# Altium PCB 2.PcbDoc (part 2 of 2)
Units mm, origin at the board's own origin, x right, y up, seen from the top; angles counter-clockwise.
Board outline 132.09 x 69.72 mm, 2 copper layers (Top Layer, Bottom Layer); 43 components, 58 nets, 220 pads, 0 vias.
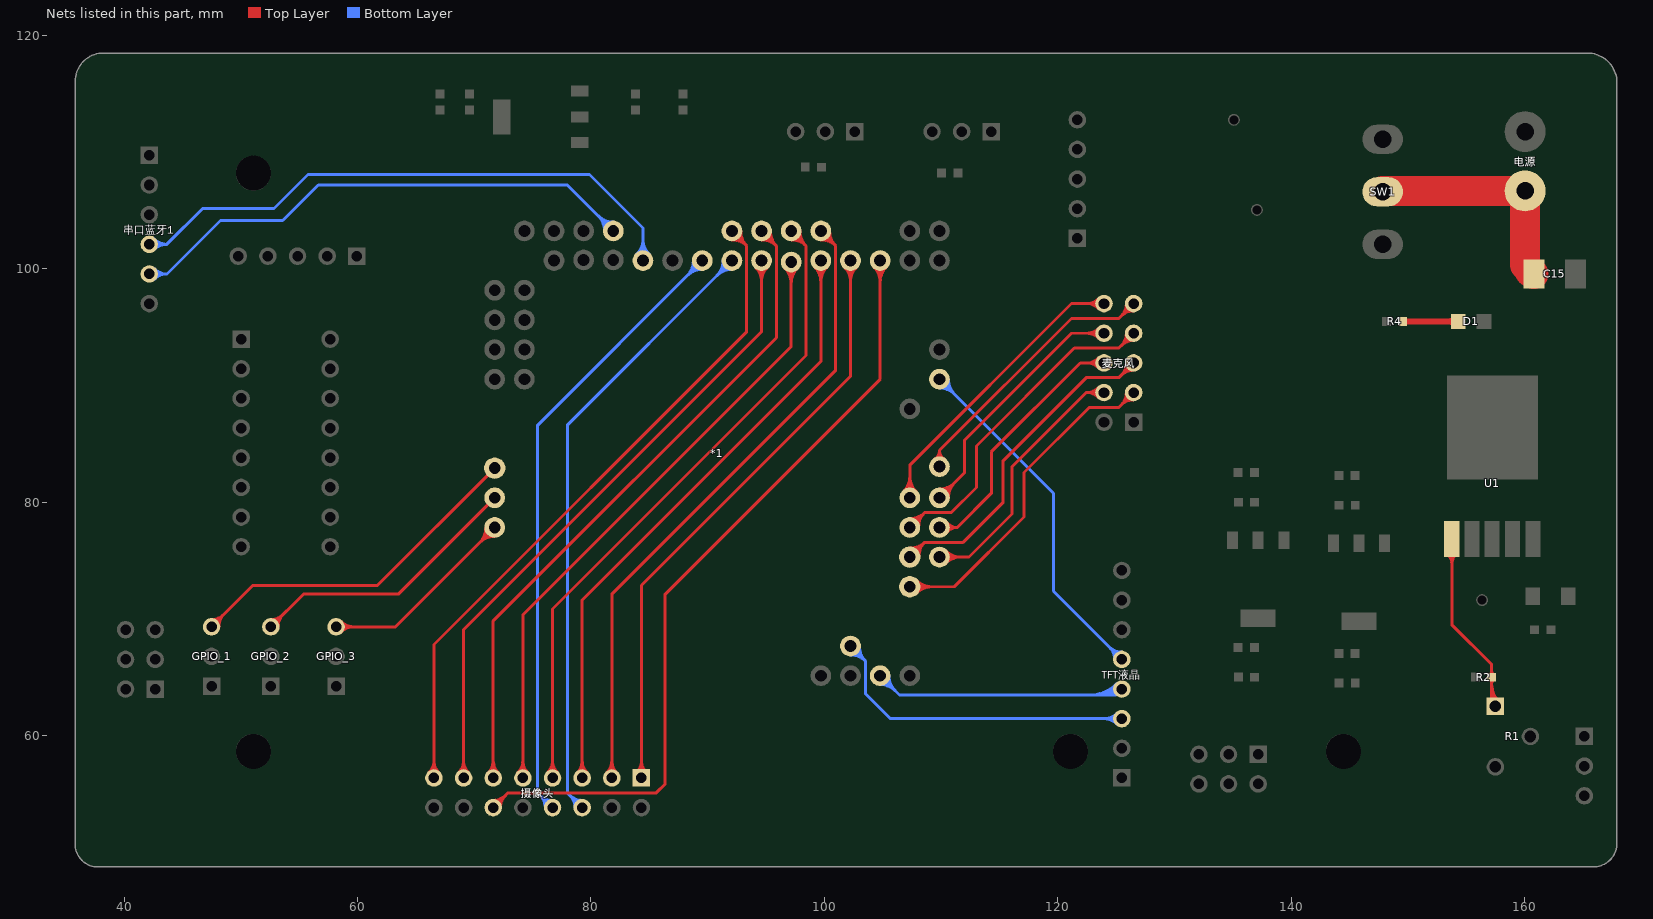
[diagram p2: the nets of this part, all layers, seen from the top]

## Nets (pads, with @x,y where several pads share a name; then routed paths per layer and width w, separated by ;. In a path a pad name is that pad's centre, name@x,y a point inside that pad or via, vN(x,y) a via of type N, cw(c..) or ccw(c..) an arc to the next point about the centre after c; other vN are vias at no path point) (continued)
MKF_1: *1.35 麦克风.4 | length 39.5
  Top Layer w0.254: *1.35@109.855,75.311 112.395,75.311 116.078,78.994 116.078,83.058 122.428,89.408 麦克风.4@123.952,89.408 ; 111.081,75.311 ccw(c111.081,74.085) 110.214,74.952 cw(c111.081,74.085) 111.081,75.311 ; 111.081,75.311 cw(c111.081,76.537) 110.214,75.67 ccw(c111.081,76.537) 111.081,75.311 ; 111.695,75.311 ccw(c111.695,73.471) 110.394,74.772 cw(c111.695,73.471) 111.695,75.311 ; 111.695,75.311 cw(c111.695,77.151) 110.394,75.85 ccw(c111.695,77.151) 111.695,75.311 ; 122.448,89.408 ccw(c122.448,90.912) 123.511,89.849 cw(c122.448,90.912) 122.448,89.408 ; 122.448,89.408 cw(c122.448,87.904) 123.511,88.967 ccw(c122.448,87.904) 122.448,89.408 ; 123.061,89.408 ccw(c123.061,90.299) 123.691,89.669 cw(c123.061,90.299) 123.061,89.408 ; 123.061,89.408 cw(c123.061,88.517) 123.691,89.147 ccw(c123.061,88.517) 123.061,89.408
MKF_2: *1.36 麦克风.3 | length 46.3
  Top Layer w0.254: *1.36@107.315,72.771 111.125,72.771 117.094,78.74 117.094,82.55 122.682,88.138 125.222,88.138 麦克风.3@126.492,89.408 麦克风.3@125.984,89.408 ; 108.603,72.771 ccw(c108.603,71.483) 107.692,72.394 cw(c108.603,71.483) 108.603,72.771 ; 108.603,72.771 cw(c108.603,74.059) 107.692,73.148 ccw(c108.603,74.059) 108.603,72.771 ; 109.216,72.771 ccw(c109.216,70.87) 107.872,72.214 cw(c109.216,70.87) 109.216,72.771 ; 109.216,72.771 cw(c109.216,74.672) 107.872,73.328 ccw(c109.216,74.672) 109.216,72.771 ; 125.428,88.344 ccw(c124.365,89.408) 125.869,89.408 cw(c124.365,89.408) 125.428,88.344 ; 125.428,88.344 cw(c126.492,87.281) 126.492,88.785 ccw(c126.492,87.281) 125.428,88.344 ; 125.862,88.778 ccw(c125.232,89.408) 126.123,89.408 cw(c125.232,89.408) 125.862,88.778 ; 125.862,88.778 cw(c126.492,88.148) 126.492,89.039 ccw(c126.492,88.148) 125.862,88.778
MKF_3: *1.37 麦克风.6 | length 36.6
  Top Layer w0.254: *1.37@109.855,77.851 111.379,77.851 ; 麦克风.6@123.952,91.948 121.92,91.948 114.3,84.328 114.3,80.772 111.379,77.851 ; 110.871,77.851 ccw(c110.871,77.089) 110.261,77.546 cw(c110.871,77.089) 110.871,77.851 ; 110.871,77.851 cw(c110.871,78.613) 110.261,78.156 ccw(c110.871,78.613) 110.871,77.851 ; 111.379,77.851 ccw(c111.379,76.708) 110.465,77.394 cw(c111.379,76.708) 111.379,77.851 ; 111.379,77.851 cw(c111.379,78.994) 110.465,78.308 ccw(c111.379,78.994) 111.379,77.851 ; 122.448,91.948 ccw(c122.448,93.452) 123.511,92.389 cw(c122.448,93.452) 122.448,91.948 ; 122.448,91.948 cw(c122.448,90.444) 123.511,91.507 ccw(c122.448,90.444) 122.448,91.948 ; 123.061,91.948 ccw(c123.061,92.839) 123.691,92.209 cw(c123.061,92.839) 123.061,91.948 ; 123.061,91.948 cw(c123.061,91.057) 123.691,91.687 ccw(c123.061,91.057) 123.061,91.948
MKF_4: *1.38 麦克风.5 | length 44.8
  Top Layer w0.254: *1.38@107.315,75.311 108.585,76.581 ; 麦克风.5@126.492,91.948 125.222,90.678 122.428,90.678 115.316,83.566 115.316,80.01 111.887,76.581 108.585,76.581 ; 108.175,76.171 ccw(c108.968,75.379) 107.848,75.333 cw(c108.968,75.379) 108.175,76.171 ; 108.175,76.171 cw(c107.383,76.964) 107.337,75.844 ccw(c107.383,76.964) 108.175,76.171 ; 108.585,76.581 ccw(c109.755,75.411) 108.102,75.343 cw(c109.755,75.411) 108.585,76.581 ; 108.585,76.581 cw(c107.415,77.751) 107.347,76.098 ccw(c107.415,77.751) 108.585,76.581 ; 125.428,90.884 ccw(c124.365,91.948) 125.869,91.948 cw(c124.365,91.948) 125.428,90.884 ; 125.428,90.884 cw(c126.492,89.821) 126.492,91.325 ccw(c126.492,89.821) 125.428,90.884 ; 125.862,91.318 ccw(c125.232,91.948) 126.123,91.948 cw(c125.232,91.948) 125.862,91.318 ; 125.862,91.318 cw(c126.492,90.688) 126.492,91.579 ccw(c126.492,90.688) 125.862,91.318
MKF_5: *1.39 麦克风.8 | length 38.7
  Top Layer w0.254: *1.39@109.855,80.391 112.014,82.55 112.014,85.344 121.158,94.488 麦克风.8@123.952,94.488 ; 110.722,81.258 ccw(c111.589,80.391) 110.363,80.391 cw(c111.589,80.391) 110.722,81.258 ; 110.722,81.258 cw(c109.855,82.125) 109.855,80.899 ccw(c109.855,82.125) 110.722,81.258 ; 111.156,81.692 ccw(c112.457,80.391) 110.617,80.391 cw(c112.457,80.391) 111.156,81.692 ; 111.156,81.692 cw(c109.855,82.993) 109.855,81.153 ccw(c109.855,82.993) 111.156,81.692 ; 122.448,94.488 ccw(c122.448,95.992) 123.511,94.929 cw(c122.448,95.992) 122.448,94.488 ; 122.448,94.488 cw(c122.448,92.984) 123.511,94.047 ccw(c122.448,92.984) 122.448,94.488 ; 123.061,94.488 ccw(c123.061,95.379) 123.691,94.749 cw(c123.061,95.379) 123.061,94.488 ; 123.061,94.488 cw(c123.061,93.597) 123.691,94.227 ccw(c123.061,93.597) 123.061,94.488
MKF_6: *1.40 麦克风.7 | length 45
  Top Layer w0.254: *1.40@107.315,77.851 108.585,79.121 ; 麦克风.7@126.492,94.488 125.222,93.218 121.412,93.218 113.03,84.836 113.03,81.28 110.871,79.121 108.585,79.121 ; 108.162,78.698 ccw(c108.98,77.88) 107.823,77.86 cw(c108.98,77.88) 108.162,78.698 ; 108.162,78.698 cw(c107.344,79.516) 107.324,78.359 ccw(c107.344,79.516) 108.162,78.698 ; 108.585,79.121 ccw(c109.812,77.894) 108.077,77.864 cw(c109.812,77.894) 108.585,79.121 ; 108.585,79.121 cw(c107.358,80.348) 107.328,78.613 ccw(c107.358,80.348) 108.585,79.121 ; 125.428,93.424 ccw(c124.365,94.488) 125.869,94.488 cw(c124.365,94.488) 125.428,93.424 ; 125.428,93.424 cw(c126.492,92.361) 126.492,93.865 ccw(c126.492,92.361) 125.428,93.424 ; 125.862,93.858 ccw(c125.232,94.488) 126.123,94.488 cw(c125.232,94.488) 125.862,93.858 ; 125.862,93.858 cw(c126.492,93.228) 126.492,94.119 ccw(c126.492,93.228) 125.862,93.858
MKF_7: *1.41 麦克风.10 | length 42.3
  Top Layer w0.254: *1.41@107.315,80.391 107.315,83.185 121.158,97.028 麦克风.10@123.952,97.028 ; 107.315,81.617 ccw(c108.541,81.617) 107.674,80.75 cw(c108.541,81.617) 107.315,81.617 ; 107.315,81.617 cw(c106.089,81.617) 106.956,80.75 ccw(c106.089,81.617) 107.315,81.617 ; 107.315,82.231 ccw(c109.155,82.231) 107.854,80.93 cw(c109.155,82.231) 107.315,82.231 ; 107.315,82.231 cw(c105.475,82.231) 106.776,80.93 ccw(c105.475,82.231) 107.315,82.231 ; 122.448,97.028 ccw(c122.448,98.532) 123.511,97.469 cw(c122.448,98.532) 122.448,97.028 ; 122.448,97.028 cw(c122.448,95.524) 123.511,96.587 ccw(c122.448,95.524) 122.448,97.028 ; 123.061,97.028 ccw(c123.061,97.919) 123.691,97.289 cw(c123.061,97.919) 123.061,97.028 ; 123.061,97.028 cw(c123.061,96.137) 123.691,96.767 ccw(c123.061,96.137) 123.061,97.028
MKF_8: *1.42 麦克风.9 | length 36.8
  Top Layer w0.254: *1.42@109.855,83.058 109.855,84.455 ; 麦克风.9@126.492,97.028 125.222,95.758 121.158,95.758 109.855,84.455 ; 109.855,83.989 ccw(c110.455,83.989) 110.13,83.485 cw(c110.455,83.989) 109.855,83.989 ; 109.855,83.989 cw(c109.255,83.989) 109.58,83.485 ccw(c109.255,83.989) 109.855,83.989 ; 109.855,84.455 ccw(c110.754,84.455) 110.268,83.699 cw(c110.754,84.455) 109.855,84.455 ; 109.855,84.455 cw(c108.956,84.455) 109.442,83.699 ccw(c108.956,84.455) 109.855,84.455 ; 125.428,95.964 ccw(c124.365,97.028) 125.869,97.028 cw(c124.365,97.028) 125.428,95.964 ; 125.428,95.964 cw(c126.492,94.901) 126.492,96.405 ccw(c126.492,94.901) 125.428,95.964 ; 125.862,96.398 ccw(c125.232,97.028) 126.123,97.028 cw(c125.232,97.028) 125.862,96.398 ; 125.862,96.398 cw(c126.492,95.768) 126.492,96.659 ccw(c126.492,95.768) 125.862,96.398
NetD1_1: D1.1 R4.2 | length 7.7
  Top Layer w0.508: R4.2@149.542,95.502 D1.1@154.306,95.502 ; 153.386,95.502 ccw(c153.386,96.422) 154.036,95.772 cw(c153.386,96.422) 153.386,95.502 ; 153.386,95.502 cw(c153.386,94.583) 154.036,95.233 ccw(c153.386,94.583) 153.386,95.502
NetR1_1: R1.1 R2.2 U1.1 | length 30.8
  Top Layer w0.254: U1.1@153.75,76.858 153.75,69.516 157.162,66.103 R2.2@157.162,65.022 R1.1@157.162,62.861 ; 153.75,74.695 ccw(c152.487,74.695) 153.38,75.588 cw(c152.487,74.695) 153.75,74.695 ; 153.75,74.695 cw(c155.012,74.695) 154.12,75.588 ccw(c155.012,74.695) 153.75,74.695 ; 157.162,64.409 ccw(c156.549,64.409) 156.983,64.843 cw(c156.549,64.409) 157.162,64.409 ; 157.162,64.409 cw(c157.776,64.409) 157.342,64.843 ccw(c157.776,64.409) 157.162,64.409 ; 157.162,65.636 ccw(c157.776,65.636) 157.342,65.202 cw(c157.776,65.636) 157.162,65.636 ; 157.162,65.636 cw(c156.549,65.636) 156.983,65.202 ccw(c156.549,65.636) 157.162,65.636 ; R1.1@157.162,63.226 ccw(c158.162,63.226) 157.455,62.519 cw(c158.162,63.226) R1.1@157.162,63.226 ; 157.162,63.839 ccw(c158.775,63.839) 157.635,62.699 cw(c158.775,63.839) 157.162,63.839 ; 157.162,64.452 ccw(c159.388,64.452) 157.814,62.878 cw(c159.388,64.452) 157.162,64.452
OUT1: *1.5 摄像头.1 | length 68.9
  Top Layer w0.254: 摄像头.1@84.328,56.388 84.328,72.898 102.235,90.805 *1.5@102.235,100.711 ; 84.328,57.279 ccw(c85.219,57.279) 84.589,56.649 cw(c85.219,57.279) 84.328,57.279 ; 84.328,57.279 cw(c83.437,57.279) 84.067,56.649 ccw(c83.437,57.279) 84.328,57.279 ; 84.328,57.892 ccw(c85.832,57.892) 84.769,56.829 cw(c85.832,57.892) 84.328,57.892 ; 84.328,57.892 cw(c82.824,57.892) 83.887,56.829 ccw(c82.824,57.892) 84.328,57.892 ; 102.235,98.871 ccw(c100.395,98.871) 101.696,100.172 cw(c100.395,98.871) 102.235,98.871 ; 102.235,98.871 cw(c104.075,98.871) 102.774,100.172 ccw(c104.075,98.871) 102.235,98.871 ; 102.235,99.485 ccw(c101.009,99.485) 101.876,100.352 cw(c101.009,99.485) 102.235,99.485 ; 102.235,99.485 cw(c103.461,99.485) 102.594,100.352 ccw(c103.461,99.485) 102.235,99.485
OUT2: *1.6 摄像头.3 | length 72.1
  Top Layer w0.254: 摄像头.3@81.788,56.388 81.788,72.136 100.965,91.313 100.965,101.981 ; *1.6@99.695,103.251 100.965,101.981 ; 81.788,57.279 ccw(c82.679,57.279) 82.049,56.649 cw(c82.679,57.279) 81.788,57.279 ; 81.788,57.279 cw(c80.897,57.279) 81.527,56.649 ccw(c80.897,57.279) 81.788,57.279 ; 81.788,57.892 ccw(c83.292,57.892) 82.229,56.829 cw(c83.292,57.892) 81.788,57.892 ; 81.788,57.892 cw(c80.284,57.892) 81.347,56.829 ccw(c80.284,57.892) 81.788,57.892 ; 100.542,102.404 ccw(c99.724,101.586) 99.704,102.743 cw(c99.724,101.586) 100.542,102.404 ; 100.542,102.404 cw(c101.36,103.222) 100.203,103.242 ccw(c101.36,103.222) 100.542,102.404 ; 100.965,101.981 ccw(c99.738,100.754) 99.708,102.489 cw(c99.738,100.754) 100.965,101.981 ; 100.965,101.981 cw(c102.192,103.208) 100.457,103.238 ccw(c102.192,103.208) 100.965,101.981
OUT3: *1.7 摄像头.5 | length 69.9
  Top Layer w0.254: 摄像头.5@79.248,56.388 79.248,71.628 99.695,92.075 *1.7@99.695,100.711 ; 79.248,57.279 ccw(c80.139,57.279) 79.509,56.649 cw(c80.139,57.279) 79.248,57.279 ; 79.248,57.279 cw(c78.357,57.279) 78.987,56.649 ccw(c78.357,57.279) 79.248,57.279 ; 79.248,57.892 ccw(c80.752,57.892) 79.689,56.829 cw(c80.752,57.892) 79.248,57.892 ; 79.248,57.892 cw(c77.744,57.892) 78.807,56.829 ccw(c77.744,57.892) 79.248,57.892 ; 99.695,98.871 ccw(c97.855,98.871) 99.156,100.172 cw(c97.855,98.871) 99.695,98.871 ; 99.695,98.871 cw(c101.535,98.871) 100.234,100.172 ccw(c101.535,98.871) 99.695,98.871 ; 99.695,99.485 ccw(c98.469,99.485) 99.336,100.352 cw(c98.469,99.485) 99.695,99.485 ; 99.695,99.485 cw(c100.921,99.485) 100.054,100.352 ccw(c100.921,99.485) 99.695,99.485
OUT4: *1.8 摄像头.7 | length 73.2
  Top Layer w0.254: 摄像头.7@76.708,56.388 76.708,70.866 98.425,92.583 98.425,101.981 ; *1.8@97.155,103.251 98.425,101.981 ; 76.708,57.279 ccw(c77.599,57.279) 76.969,56.649 cw(c77.599,57.279) 76.708,57.279 ; 76.708,57.279 cw(c75.817,57.279) 76.447,56.649 ccw(c75.817,57.279) 76.708,57.279 ; 76.708,57.892 ccw(c78.212,57.892) 77.149,56.829 cw(c78.212,57.892) 76.708,57.892 ; 76.708,57.892 cw(c75.204,57.892) 76.267,56.829 ccw(c75.204,57.892) 76.708,57.892 ; 98.002,102.404 ccw(c97.184,101.586) 97.164,102.743 cw(c97.184,101.586) 98.002,102.404 ; 98.002,102.404 cw(c98.82,103.222) 97.663,103.242 ccw(c98.82,103.222) 98.002,102.404 ; 98.425,101.981 ccw(c97.198,100.754) 97.168,102.489 cw(c97.198,100.754) 98.425,101.981 ; 98.425,101.981 cw(c99.652,103.208) 97.917,103.238 ccw(c99.652,103.208) 98.425,101.981
OUT5: *1.9 摄像头.9 | length 70.9
  Top Layer w0.254: 摄像头.9@74.168,56.388 74.168,70.358 97.155,93.345 *1.9@97.155,100.584 ; 74.168,57.279 ccw(c75.059,57.279) 74.429,56.649 cw(c75.059,57.279) 74.168,57.279 ; 74.168,57.279 cw(c73.277,57.279) 73.907,56.649 ccw(c73.277,57.279) 74.168,57.279 ; 74.168,57.892 ccw(c75.672,57.892) 74.609,56.829 cw(c75.672,57.892) 74.168,57.892 ; 74.168,57.892 cw(c72.664,57.892) 73.727,56.829 ccw(c72.664,57.892) 74.168,57.892 ; 97.155,98.744 ccw(c95.315,98.744) 96.616,100.045 cw(c95.315,98.744) 97.155,98.744 ; 97.155,98.744 cw(c98.995,98.744) 97.694,100.045 ccw(c98.995,98.744) 97.155,98.744 ; 97.155,99.358 ccw(c95.929,99.358) 96.796,100.225 cw(c95.929,99.358) 97.155,99.358 ; 97.155,99.358 cw(c98.381,99.358) 97.514,100.225 ccw(c98.381,99.358) 97.155,99.358
OUT6: *1.10 摄像头.11 | length 74.2
  Top Layer w0.254: 摄像头.11@71.628,56.388 71.628,69.85 95.885,94.107 95.885,101.981 ; *1.10@94.615,103.251 95.885,101.981 ; 71.628,57.279 ccw(c72.519,57.279) 71.889,56.649 cw(c72.519,57.279) 71.628,57.279 ; 71.628,57.279 cw(c70.737,57.279) 71.367,56.649 ccw(c70.737,57.279) 71.628,57.279 ; 71.628,57.892 ccw(c73.132,57.892) 72.069,56.829 cw(c73.132,57.892) 71.628,57.892 ; 71.628,57.892 cw(c70.124,57.892) 71.187,56.829 ccw(c70.124,57.892) 71.628,57.892 ; 95.462,102.404 ccw(c94.644,101.586) 94.624,102.743 cw(c94.644,101.586) 95.462,102.404 ; 95.462,102.404 cw(c96.28,103.222) 95.123,103.242 ccw(c96.28,103.222) 95.462,102.404 ; 95.885,101.981 ccw(c94.658,100.754) 94.628,102.489 cw(c94.658,100.754) 95.885,101.981 ; 95.885,101.981 cw(c97.112,103.208) 95.377,103.238 ccw(c97.112,103.208) 95.885,101.981
OUT7: *1.11 摄像头.13 | length 72.1
  Top Layer w0.254: 摄像头.13@69.088,56.388 69.088,69.088 94.615,94.615 *1.11@94.615,100.711 ; 69.088,57.279 ccw(c69.979,57.279) 69.349,56.649 cw(c69.979,57.279) 69.088,57.279 ; 69.088,57.279 cw(c68.197,57.279) 68.827,56.649 ccw(c68.197,57.279) 69.088,57.279 ; 69.088,57.892 ccw(c70.592,57.892) 69.529,56.829 cw(c70.592,57.892) 69.088,57.892 ; 69.088,57.892 cw(c67.584,57.892) 68.647,56.829 ccw(c67.584,57.892) 69.088,57.892 ; 94.615,98.871 ccw(c92.775,98.871) 94.076,100.172 cw(c92.775,98.871) 94.615,98.871 ; 94.615,98.871 cw(c96.455,98.871) 95.154,100.172 ccw(c96.455,98.871) 94.615,98.871 ; 94.615,99.485 ccw(c93.389,99.485) 94.256,100.352 cw(c93.389,99.485) 94.615,99.485 ; 94.615,99.485 cw(c95.841,99.485) 94.974,100.352 ccw(c95.841,99.485) 94.615,99.485
OUT8: *1.12 摄像头.15 | length 75.3
  Top Layer w0.254: 摄像头.15@66.548,56.388 66.548,67.818 93.345,94.615 93.345,101.981 ; *1.12@92.075,103.251 93.345,101.981 ; 66.548,57.279 ccw(c67.439,57.279) 66.809,56.649 cw(c67.439,57.279) 66.548,57.279 ; 66.548,57.279 cw(c65.657,57.279) 66.287,56.649 ccw(c65.657,57.279) 66.548,57.279 ; 66.548,57.892 ccw(c68.052,57.892) 66.989,56.829 cw(c68.052,57.892) 66.548,57.892 ; 66.548,57.892 cw(c65.044,57.892) 66.107,56.829 ccw(c65.044,57.892) 66.548,57.892 ; 92.922,102.404 ccw(c92.104,101.586) 92.084,102.743 cw(c92.104,101.586) 92.922,102.404 ; 92.922,102.404 cw(c93.74,103.222) 92.583,103.242 ccw(c93.74,103.222) 92.922,102.404 ; 93.345,101.981 ccw(c92.118,100.754) 92.088,102.489 cw(c92.118,100.754) 93.345,101.981 ; 93.345,101.981 cw(c94.572,103.208) 92.837,103.238 ccw(c94.572,103.208) 93.345,101.981
RED_1: *1.28 GPIO_1.3 | length 37.4
  Top Layer w0.254: GPIO_1.3@47.498,69.342 51.054,72.898 61.722,72.898 *1.28@71.755,82.931 ; 48.128,69.972 ccw(c48.758,69.342) 47.867,69.342 cw(c48.758,69.342) 48.128,69.972 ; 48.128,69.972 cw(c47.498,70.602) 47.498,69.711 ccw(c47.498,70.602) 48.128,69.972 ; 48.562,70.406 ccw(c49.625,69.342) 48.121,69.342 cw(c49.625,69.342) 48.562,70.406 ; 48.562,70.406 cw(c47.498,71.469) 47.498,69.965 ccw(c47.498,71.469) 48.562,70.406
RED_2: *1.29 GPIO_2.3 | length 31.3
  Top Layer w0.254: GPIO_2.3@52.578,69.342 55.372,72.136 63.5,72.136 *1.29@71.755,80.391 ; 53.208,69.972 ccw(c53.838,69.342) 52.947,69.342 cw(c53.838,69.342) 53.208,69.972 ; 53.208,69.972 cw(c52.578,70.602) 52.578,69.711 ccw(c52.578,70.602) 53.208,69.972 ; 53.642,70.406 ccw(c54.705,69.342) 53.201,69.342 cw(c54.705,69.342) 53.642,70.406 ; 53.642,70.406 cw(c52.578,71.469) 52.578,69.965 ccw(c52.578,71.469) 53.642,70.406
RED_3: *1.30 GPIO_3.3 | length 30.4
  Top Layer w0.254: GPIO_3.3@58.166,69.342 63.246,69.342 *1.30@71.755,77.851 ; 59.057,69.342 ccw(c59.057,68.451) 58.427,69.081 cw(c59.057,68.451) 59.057,69.342 ; 59.057,69.342 cw(c59.057,70.233) 58.427,69.603 ccw(c59.057,70.233) 59.057,69.342 ; 59.67,69.342 ccw(c59.67,67.838) 58.607,68.901 cw(c59.67,67.838) 59.67,69.342 ; 59.67,69.342 cw(c59.67,70.846) 58.607,69.783 ccw(c59.67,70.846) 59.67,69.342 ; 70.454,76.55 ccw(c69.153,77.851) 70.993,77.851 cw(c69.153,77.851) 70.454,76.55 ; 70.454,76.55 cw(c71.755,75.249) 71.755,77.089 ccw(c71.755,75.249) 70.454,76.55
RES: *1.43 TFT液晶.5 | length 47.6
  Bottom Layer w0.254: *1.43@109.855,90.551 119.634,80.772 119.634,72.39 TFT液晶.5@125.476,66.548 ; 110.722,89.684 ccw(c109.855,88.817) 109.855,90.043 cw(c109.855,88.817) 110.722,89.684 ; 110.722,89.684 cw(c111.589,90.551) 110.363,90.551 ccw(c111.589,90.551) 110.722,89.684 ; 111.156,89.25 ccw(c109.855,87.949) 109.855,89.789 cw(c109.855,87.949) 111.156,89.25 ; 111.156,89.25 cw(c112.457,90.551) 110.617,90.551 ccw(c112.457,90.551) 111.156,89.25 ; 124.412,67.612 ccw(c125.476,68.675) 125.476,67.171 cw(c125.476,68.675) 124.412,67.612 ; 124.412,67.612 cw(c123.349,66.548) 124.853,66.548 ccw(c123.349,66.548) 124.412,67.612 ; 124.846,67.178 ccw(c125.476,67.808) 125.476,66.917 cw(c125.476,67.808) 124.846,67.178 ; 124.846,67.178 cw(c124.216,66.548) 125.107,66.548 ccw(c124.216,66.548) 124.846,67.178
SCL: *1.32 TFT液晶.3 | length 44.3
  Bottom Layer w0.254: *1.32@102.235,67.691 103.505,66.421 ; TFT液晶.3@125.476,61.468 105.664,61.468 103.505,63.627 103.505,66.421 ; 103.082,66.844 ccw(c102.264,66.026) 102.244,67.183 cw(c102.264,66.026) 103.082,66.844 ; 103.082,66.844 cw(c103.9,67.662) 102.743,67.682 ccw(c103.9,67.662) 103.082,66.844 ; 103.505,66.421 ccw(c102.278,65.194) 102.248,66.929 cw(c102.278,65.194) 103.505,66.421 ; 103.505,66.421 cw(c104.732,67.648) 102.997,67.678 ccw(c104.732,67.648) 103.505,66.421 ; 123.972,61.468 ccw(c123.972,62.972) 125.035,61.909 cw(c123.972,62.972) 123.972,61.468 ; 123.972,61.468 cw(c123.972,59.964) 125.035,61.027 ccw(c123.972,59.964) 123.972,61.468 ; 124.585,61.468 ccw(c124.585,62.359) 125.215,61.729 cw(c124.585,62.359) 124.585,61.468 ; 124.585,61.468 cw(c124.585,60.577) 125.215,61.207 ccw(c124.585,60.577) 124.585,61.468
SDA: *1.33 TFT液晶.4 | length 45.8
  Bottom Layer w0.254: *1.33@104.775,65.151 106.426,63.5 124.968,63.5 TFT液晶.4@125.476,64.008 ; 105.642,64.284 ccw(c104.775,63.417) 104.775,64.643 cw(c104.775,63.417) 105.642,64.284 ; 105.642,64.284 cw(c106.509,65.151) 105.283,65.151 ccw(c106.509,65.151) 105.642,64.284 ; 106.076,63.85 ccw(c104.775,62.549) 104.775,64.389 cw(c104.775,62.549) 106.076,63.85 ; 106.076,63.85 cw(c107.377,65.151) 105.537,65.151 ccw(c107.377,65.151) 106.076,63.85 ; 122.746,63.5 ccw(c122.746,66.738) 125.035,64.449 cw(c122.746,66.738) 122.746,63.5 ; 123.359,63.5 ccw(c123.359,66.125) 125.215,64.269 cw(c123.359,66.125) 123.359,63.5 ; 123.972,63.5 ccw(c123.972,65.512) 125.395,64.089 cw(c123.972,65.512) 123.972,63.5 ; 124.585,63.5 ccw(c124.585,64.899) 125.574,63.91 cw(c124.585,64.899) 124.585,63.5
SSCL: *1.13 摄像头.6 | length 70.4
  Bottom Layer w0.254: 摄像头.6@79.248,53.848 77.978,55.118 77.978,86.614 *1.13@92.075,100.711 ; 78.184,54.912 ccw(c79.248,55.975) 79.248,54.471 cw(c79.248,55.975) 78.184,54.912 ; 78.184,54.912 cw(c77.121,53.848) 78.625,53.848 ccw(c77.121,53.848) 78.184,54.912 ; 78.618,54.478 ccw(c79.248,55.108) 79.248,54.217 cw(c79.248,55.108) 78.618,54.478 ; 78.618,54.478 cw(c77.988,53.848) 78.879,53.848 ccw(c77.988,53.848) 78.618,54.478 ; 90.774,99.41 ccw(c89.473,100.711) 91.313,100.711 cw(c89.473,100.711) 90.774,99.41 ; 90.774,99.41 cw(c92.075,98.109) 92.075,99.949 ccw(c92.075,98.109) 90.774,99.41 ; 91.208,99.844 ccw(c90.341,100.711) 91.567,100.711 cw(c90.341,100.711) 91.208,99.844 ; 91.208,99.844 cw(c92.075,98.977) 92.075,100.203 ccw(c92.075,98.977) 91.208,99.844
SSDA: *1.14 摄像头.8 | length 70.4
  Bottom Layer w0.254: 摄像头.8@76.708,53.848 75.438,55.118 75.438,86.614 *1.14@89.535,100.711 ; 75.644,54.912 ccw(c76.708,55.975) 76.708,54.471 cw(c76.708,55.975) 75.644,54.912 ; 75.644,54.912 cw(c74.581,53.848) 76.085,53.848 ccw(c74.581,53.848) 75.644,54.912 ; 76.078,54.478 ccw(c76.708,55.108) 76.708,54.217 cw(c76.708,55.108) 76.078,54.478 ; 76.078,54.478 cw(c75.448,53.848) 76.339,53.848 ccw(c75.448,53.848) 76.078,54.478 ; 88.234,99.41 ccw(c86.933,100.711) 88.773,100.711 cw(c86.933,100.711) 88.234,99.41 ; 88.234,99.41 cw(c89.535,98.109) 89.535,99.949 ccw(c89.535,98.109) 88.234,99.41 ; 88.668,99.844 ccw(c87.801,100.711) 89.027,100.711 cw(c87.801,100.711) 88.668,99.844 ; 88.668,99.844 cw(c89.535,98.977) 89.535,100.203 ccw(c89.535,98.977) 88.668,99.844
UART4_RX: *1.16 串口蓝牙1.4 | length 65.4
  Bottom Layer w0.254: 串口蓝牙1.4@42.164,102.108 串口蓝牙1.4@42.418,102.108 ; *1.16@84.455,100.711 84.455,103.505 79.883,108.077 55.753,108.077 52.852,105.176 46.736,105.176 43.668,102.108 ; 43.055,102.108 ccw(c43.055,101.217) 42.425,101.847 cw(c43.055,101.217) 43.055,102.108 ; 43.055,102.108 cw(c43.055,102.999) 42.425,102.369 ccw(c43.055,102.999) 43.055,102.108 ; 43.668,102.108 ccw(c43.668,100.604) 42.605,101.667 cw(c43.668,100.604) 43.668,102.108 ; 43.668,102.108 cw(c43.668,103.612) 42.605,102.549 ccw(c43.668,103.612) 43.668,102.108 ; 84.455,101.937 ccw(c85.681,101.937) 84.814,101.07 cw(c85.681,101.937) 84.455,101.937 ; 84.455,101.937 cw(c83.229,101.937) 84.096,101.07 ccw(c83.229,101.937) 84.455,101.937 ; 84.455,102.551 ccw(c86.295,102.551) 84.994,101.25 cw(c86.295,102.551) 84.455,102.551 ; 84.455,102.551 cw(c82.615,102.551) 83.916,101.25 ccw(c82.615,102.551) 84.455,102.551
UART4_TX: *1.17 串口蓝牙1.5 | length 61.7
  Bottom Layer w0.254: 串口蓝牙1.5@42.164,99.568 43.688,99.568 48.26,104.14 53.594,104.14 56.642,107.188 77.978,107.188 *1.17@81.915,103.251 ; 43.055,99.568 ccw(c43.055,98.677) 42.425,99.307 cw(c43.055,98.677) 43.055,99.568 ; 43.055,99.568 cw(c43.055,100.459) 42.425,99.829 ccw(c43.055,100.459) 43.055,99.568 ; 43.668,99.568 ccw(c43.668,98.064) 42.605,99.127 cw(c43.668,98.064) 43.668,99.568 ; 43.668,99.568 cw(c43.668,101.072) 42.605,100.009 ccw(c43.668,101.072) 43.668,99.568 ; 80.614,104.552 ccw(c81.915,105.853) 81.915,104.013 cw(c81.915,105.853) 80.614,104.552 ; 80.614,104.552 cw(c79.313,103.251) 81.153,103.251 ccw(c79.313,103.251) 80.614,104.552 ; 81.048,104.118 ccw(c81.915,104.985) 81.915,103.759 cw(c81.915,104.985) 81.048,104.118 ; 81.048,104.118 cw(c80.181,103.251) 81.407,103.251 ccw(c80.181,103.251) 81.048,104.118
VBAT: C15.1 SW1.2 电源.1 | length 22.3
  Top Layer w2.54: SW1.2@147.828,106.68 电源.1@160.02,106.68 160.02,100.33 C15.1@160.782,99.568 ; 160.02,100.864 ccw(c161.728,100.864) 160.52,99.656 cw(c161.728,100.864) 160.02,100.864
VSYNC: *1.4 摄像头.12 | length 85.2
  Top Layer w0.254: 摄像头.12@71.628,53.848 72.898,55.118 85.598,55.118 86.36,55.88 86.36,72.136 104.775,90.551 *1.4@104.775,100.711 ; 72.258,54.478 ccw(c72.888,53.848) 71.997,53.848 cw(c72.888,53.848) 72.258,54.478 ; 72.258,54.478 cw(c71.628,55.108) 71.628,54.217 ccw(c71.628,55.108) 72.258,54.478 ; 72.692,54.912 ccw(c73.755,53.848) 72.251,53.848 cw(c73.755,53.848) 72.692,54.912 ; 72.692,54.912 cw(c71.628,55.975) 71.628,54.471 ccw(c71.628,55.975) 72.692,54.912 ; 104.775,98.871 ccw(c102.935,98.871) 104.236,100.172 cw(c102.935,98.871) 104.775,98.871 ; 104.775,98.871 cw(c106.615,98.871) 105.314,100.172 ccw(c106.615,98.871) 104.775,98.871 ; 104.775,99.485 ccw(c103.549,99.485) 104.416,100.352 cw(c103.549,99.485) 104.775,99.485 ; 104.775,99.485 cw(c106.001,99.485) 105.134,100.352 ccw(c106.001,99.485) 104.775,99.485
pads on no net: SW1.3 串口蓝牙1.1 串口蓝牙1.6 摄像头.10

## Polygon pours and split planes (outlines as drawn)
GND on Bottom Layer "T Layer-No Net" (hatched 90Degree grid 0.508 track 0.203, remove dead copper, pour order 5): 35.814,119.126 168.402,119.126 168.656,118.872 168.656,47.498 35.306,47.498 34.798,48.006 34.798,119.38 35.814,119.38 36.068,119.126
GND on Top Layer "T Layer-No Net" (hatched 90Degree grid 0.508 track 0.203, remove dead copper, pour order 7): 35.814,119.38 168.656,119.38 168.656,48.006 168.148,47.498 167.894,47.752 35.052,47.752 35.052,119.126 35.306,119.38

## Keep-outs
Keep-Out Layer:
  the board outline again, w0.254

## Other copper
Top Layer:
  rectangle net GND: 129.794,100.33 130.81,101.854
  rectangle net 7.2V: 158.242,75.438 159.512,80.264
  rectangle net 5V_1: 71.882,112.268 79.756,113.792
  rectangle net 7.2V: 134.96,82.042 135.89,83.312
  rectangle net 7.2V: 134.62,79.502 135.89,80.518
  rectangle net 7.2V: 143.256,81.534 144.526,82.804
  rectangle net 7.2V: 143.561,79.248 144.526,80.264
  text "信标" at 34.544,55.118 h4
  text "给个奖嘛" at 93.218,54.102 h3.5
  text "2019" at 36.576,51.054 h4
  text "2019" at 147.32,50.865 h4
  text "黑龙江八一农垦大学" at 90.678,50.292 h3.5

## Silkscreen, mask and mechanical layers (free items; w line width, h text height)
Top Overlay:
  text "GND" at 124.206,112.014 h1.02 r90
  text "GND" at 154.686,111.252 h1.52 r90
  text "GND" at 167.386,110.49 h1.52 r90
  text "IN4" at 124.206,109.728 h1.02 r90
  text "GND" at 101.854,109.474 h1.02
  text "GND" at 114.046,109.474 h1.02
  text "IN3" at 124.206,107.188 h1.02 r90
  text "5V" at 44.45,106.68 h1.02 r90
  text "7.2V" at 154.94,105.41 h1.52 r90
  text "IN2" at 124.206,104.648 h1.02 r90
  text "7.2V" at 167.386,104.394 h1.52 r90
  text "GND" at 44.45,103.886 h1.02 r90
  text "IN5" at 49.276,102.616 h1.02
  text "IN6" at 51.816,102.616 h1.02
  text "IN7" at 54.356,102.616 h1.02
  text "IN8" at 56.896,102.616 h1.02
  text "GND" at 59.182,102.616 h1.02
  text "IN1" at 124.206,102.108 h1.02 r90
  text "RX" at 44.45,101.6 h1.02 r90
  text "TX" at 44.45,99.06 h1.02 r90
  text "7" at 122.174,97.028 h1.02 r90
  text "8" at 129.032,96.774 h1.02 r90
  text "5" at 122.174,94.234 h1.02 r90
  text "6" at 128.778,94.234 h1.02 r90
  text "3" at 122.174,91.694 h1.02 r90
  text "4" at 128.778,91.694 h1.02 r90
  text "1" at 122.174,89.154 h1.02 r90
  text "2" at 128.778,89.154 h1.02 r90
  text "5V" at 122.174,86.36 h1.02 r90
  text "GND" at 129.032,85.852 h1.02 r90
  text "3.3V" at 123.444,73.406 h1.02 r90
  text "5V" at 47.244,62.484 h1.02 r270
  text "5V" at 52.324,62.484 h1.02 r270
  text "5V" at 57.912,62.23 h1.02 r270
  text "GND" at 163.322,59.436 h1.02 r90
  text "GND" at 123.698,55.118 h1.02 r90
  text "FTM1" at 163.322,53.594 h1.02 r90

## Text inside footprints (layer, text, board x,y; h text height)
1: Top Overlay "3.3V" at 138.938,55.372 h1.02; Top Overlay "GND" at 139.192,57.912 h1.02
2: Top Overlay "5V" at 39.116,72.644 h1.02 r270; Top Overlay "GND" at 42.418,73.66 h1.02 r270
摄像头: Top Overlay "CLK" at 83.566,51.054 h1.02; Top Overlay "OUT1" at 82.55,58.166 h1.02; Top Overlay "OUT8" at 63.754,58.166 h1.02; Top Overlay "3.3V" at 64.262,51.054 h1.02